# Altium PCB CANwheel.PcbDoc
Units mm, origin at the board's own origin, x right, y up, seen from the top; angles counter-clockwise.
Board outline 89.41 x 48.44 mm, 2 copper layers (Top Layer, Bottom Layer); 59 components, 50 nets, 191 pads, 51 vias.
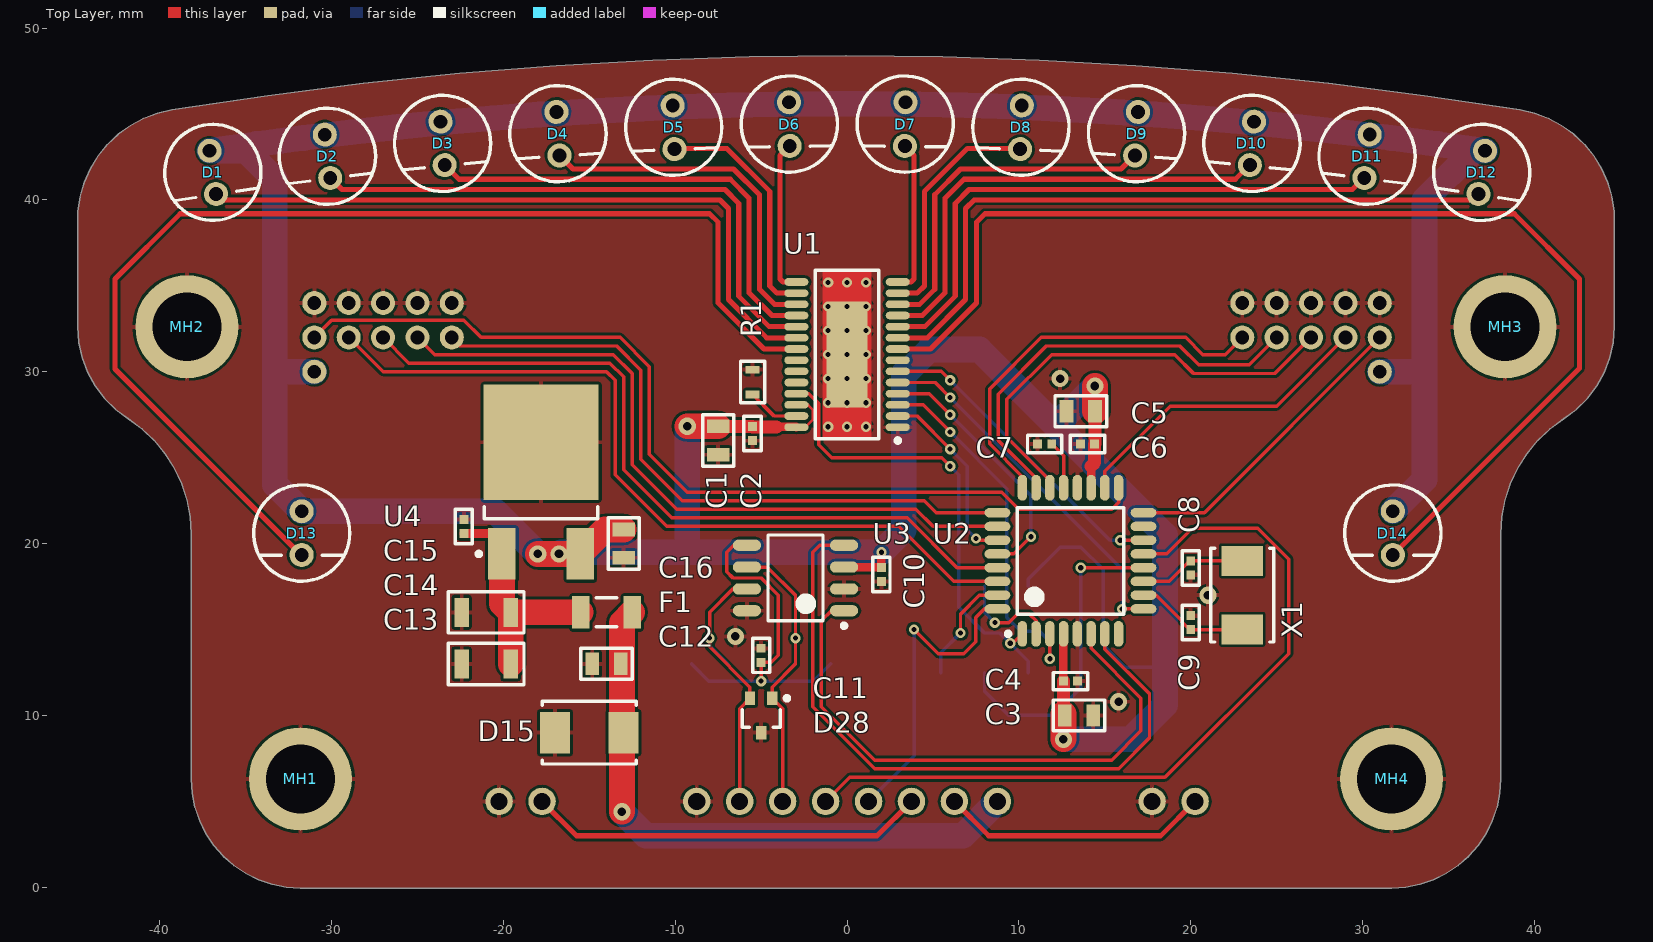
[diagram p0: Top Layer view]
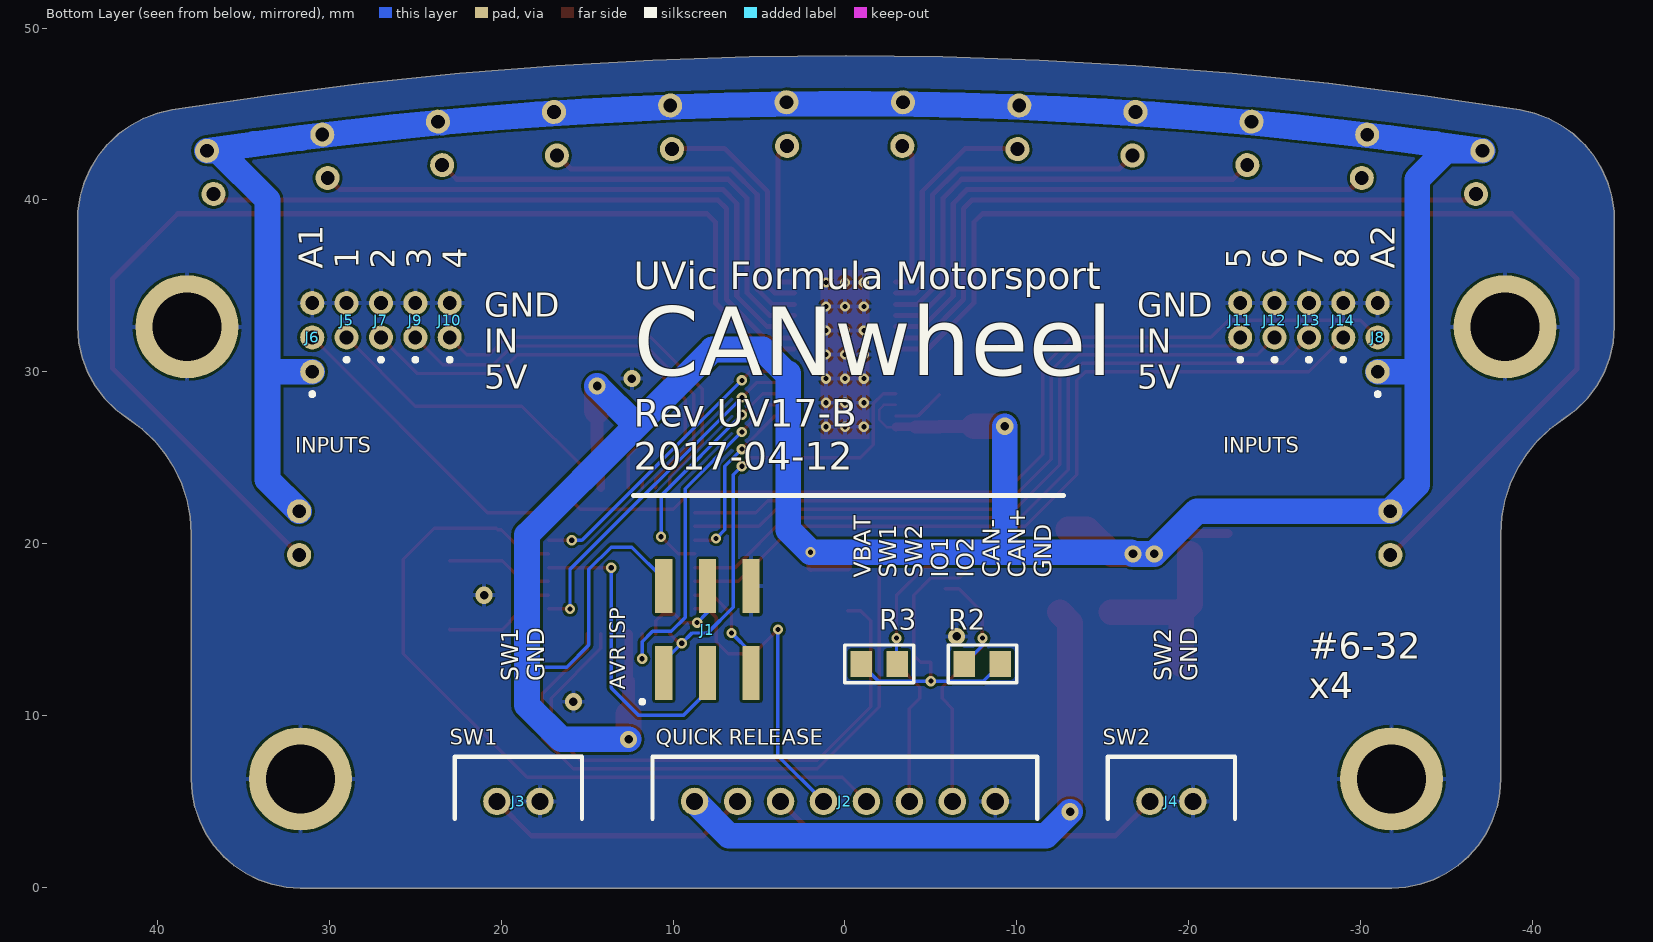
[diagram p1: Bottom Layer view, seen from below]
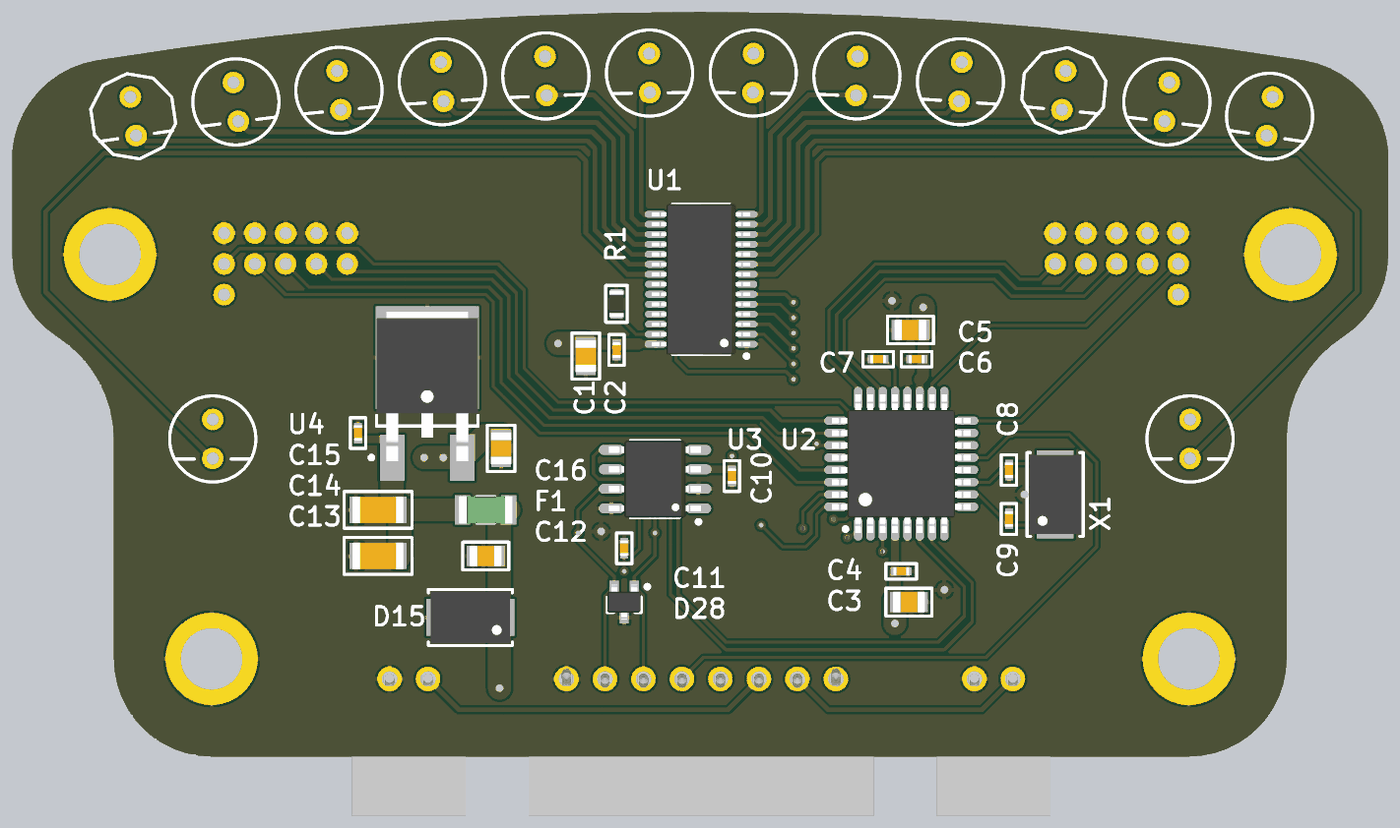
[diagram p2: 3D render of the assembled board from above, using the file's embedded part models]

## Layer stack, top to bottom
Top Solder: solder mask 0.0102, Solder Resist, Dk 3.5
Top Layer: signal copper 0.0356
Dielectric 1: dielectric 0.32, FR-4, Dk 4.8
Bottom Layer: signal copper 0.0356
Bottom Solder: solder mask 0.0102, Solder Resist, Dk 3.5

## Board outline
-38.224,21.56 -38.41,22.537 -38.716,23.483 -39.139,24.384 -39.671,25.224 -40.303,25.992 -41.027,26.674 -41.831,27.26 -42.56,27.802 -43.205,28.444 -43.751,29.17 -44.188,29.967 -44.507,30.819 -44.701,31.707 -44.766,32.614 -44.766,39.325 -44.636,40.183 -44.393,41.017 -44.043,41.811 -43.59,42.551 -43.044,43.226 -42.413,43.822 -41.709,44.329 -40.944,44.739 -40.132,45.044 -39.286,45.239 -33.721,46.074 -28.138,46.782 -22.541,47.361 -16.931,47.811 -11.313,48.133 -5.689,48.325 -0.061,48.389 5.566,48.325 11.19,48.133 16.808,47.811 22.418,47.361 28.016,46.782 33.598,46.074 39.164,45.239 40.009,45.044 40.822,44.739 41.587,44.329 42.291,43.822 42.921,43.226 43.468,42.551 43.92,41.811 44.271,41.017 44.513,40.183 44.643,39.325 44.643,32.614 44.578,31.707 44.384,30.819 44.065,29.967 43.628,29.17 43.082,28.444 42.437,27.802 41.708,27.26 40.904,26.674 40.181,25.992 39.548,25.224 39.016,24.384 38.594,23.483 38.287,22.537 38.101,21.56 38.039,20.568 38.039,6.304 37.984,5.475 37.822,4.66 37.555,3.874 37.188,3.129 36.726,2.438 36.179,1.813 35.554,1.266 34.864,0.804 34.119,0.437 33.332,0.17 32.518,0.008 31.689,-0.046 -31.811,-0.046 -32.64,0.008 -33.455,0.17 -34.241,0.437 -34.986,0.804 -35.677,1.266 -36.301,1.813 -36.849,2.438 -37.311,3.129 -37.678,3.874 -37.945,4.66 -38.107,5.475 -38.161,6.304 -38.161,20.568

## Design rules (kind name [scope] priority, off if disabled: settings)
Clearance [All] p1: gap=0.152 ignorepadtopadclearanceinfootprint=FALSE
HoleSize [All] p1: absolutevalues=TRUE maxlimit=6.3 minlimit=0.025 maxpercent=80.000 minpercent=20.000
MinimumSolderMaskSliver [All] p1: minsoldermaskwidth=0.01
PlaneConnect [All] p1: planeconnectstyle=Relief reliefexpansion=0.508 reliefentries=4 reliefconductorwidth=0.254 reliefairgap=0.2
PolygonConnect [All] p1: connectstyle=Relief reliefconductorwidth=0.254 reliefentries=4 polygonreliefangle="90 Angle" airgapwidth=0.15
RoutingVias [All] p1: holewidth=0.711 width=1.27 viastyle="Through Hole" minholewidth=0.3 minwidth=0.6 maxholewidth=0.711 maxwidth=1.27
SilkToSilkClearance [All] p1: silktosilkclearance=0.15
SilkToSolderMaskClearance [IsPad] p1: minsilkscreentomaskgap=0.1 clearancetoexposedcopper=TRUE
SolderMaskExpansion [All] p1: expansion=0.02
Width [All] p1: maxlimit=2 minlimit=0.152 preferedwidth=0.152 minimp=50.000000 maximp=50.000000 favimp=50.000000
25 further rules are at their usual default settings.

## Classes and differential pairs
net class INPUT: IN_1 IN_2 IN_3 IN_4 IN_5 IN_6 IN_7 IN_8 IN_A_1 IN_A_2
component class Mechanical: MH1 MH2 MH3 MH4
component class LEDs: C1 C2 D1 D2 D3 D4 D5 D6 D7 D8 D9 D10 D11 D12 D13 D14 R1 U1
component class Microcontroller: C3 C4 C5 C6 C7 C8 C9 C10 C11 J1 R2 R3 U2 U3 X1
component class Power: C12 C13 C14 C15 C16 D15 F1 U4
component class Connectors: D28 D? J2 J3 J4 J5 J6 J7 J8 J9 J10 J11 J12 J13 J14 J?

## Components (designator, comment, footprint, x,y, rotation, side; value= is the part's Value field where it differs from the comment)
C1 "CAP 10µF ±10% 6.3V 0805 X7R" CAP-0805-M -7.5,26 r270 top value=10µF
C2 "CAP 0.10µF ±10% 6.3V 0402 X7R" CAP-0402-M -5.5,26.4 r270 top value=0.10µF
C3 "CAP 10µF ±10% 6.3V 0805 X7R" CAP-0805-M 13.5,10 r0 top value=10µF
C4 "CAP 0.10µF ±10% 6.3V 0402 X7R" CAP-0402-M 13,12 r0 top value=0.10µF
C5 "CAP 10µF ±10% 6.3V 0805 X7R" CAP-0805-M 13.6,27.7 r180 top value=10µF
C6 "CAP 0.10µF ±10% 6.3V 0402 X7R" CAP-0402-M 14,25.8 r180 top value=0.10µF
C7 "CAP 0.10µF ±10% 6.3V 0402 X7R" CAP-0402-M 11.5,25.8 r180 top value=0.10µF
C8 "CAP 12pF ±5% 50V 0402 C0G, NP0" CAP-0402-M 20,18.59 r90 top value=12pF
C9 "CAP 12pF ±5% 50V 0402 C0G, NP0" CAP-0402-M 20,15.41 r270 top value=12pF
C10 "CAP 0.10µF ±10% 6.3V 0402 X7R" CAP-0402-M 2,18.2 r270 top value=0.10µF
C11 "CAP 4700pF ±10% 16V 0402 X7R" CAP-0402-M -5,13.5 r270 top value=4.7nF
C12 "CAP 1nF ±10% 250V 0805 X7R" CAP-0805-M -14,13 r180 top value=1nF
C13 "CAP 10µF ±10% 25V 1206 X7R" CAP-1206-M -21,13 r0 top value=10µF
C14 "CAP 10µF ±10% 25V 1206 X7R" CAP-1206-M -21,16 r0 top value=10µF
C15 "CAP 0.10µF ±10% 25V 0402 X7R" CAP-0402-M -22.3,21 r270 top value=0.10µF
C16 "CAP 10µF ±10% 6.3V 0805 X7R" CAP-0805-M -13,20 r270 top value=10µF
D1 "C503B-GCN" LED-5MM-G -36.908,41.603 r278.43 top locked
D2 "C503B-GCN" LED-5MM-G -30.234,42.54 r277.09 top locked
D3 "C503B-GCN" LED-5MM-G -23.537,43.29 r275.53 top locked
D4 "C503B-GCN" LED-5MM-G -16.822,43.853 r273.96 top locked
D5 "C503B-RCN" LED-5MM-R -10.093,44.228 r272.39 top locked
D6 "C503B-RCN" LED-5MM-R -3.357,44.415 r270.83 top locked
D7 "C503B-RCN" LED-5MM-R 3.382,44.415 r269.26 top locked
D8 "C503B-RCN" LED-5MM-R 10.118,44.228 r267.69 top locked
D9 "C503B-BCN" LED-5MM-B 16.846,43.853 r266.13 top locked
D10 "C503B-BCN" LED-5MM-B 23.562,43.29 r264.56 top locked
D11 "C503B-BCN" LED-5MM-B 30.259,42.54 r262.99 top locked
D12 "C503B-BCN" LED-5MM-B 36.932,41.603 r261.43 top locked
D13 "C503B-ACN" LED-5MM-A -31.738,20.612 r270 top locked
D14 "C503B-GCN" LED-5MM-G 31.762,20.612 r270 top locked
D15 "SMAJ30C" SON127P500X135-2N -15,9 r180 top
D28 "PESD1CAN-U" SOT65P210X110-3N -5,10 r270 top
F1 "0ZCJ0035AF2E" 0ZCJ-1206-0.9 -14,16 r180 top value=350mA
J1 "M20-8760342" M20-8760342 8,15 r180 bottom
J2 "53426-0810" 53426-0810 0,5 r180 bottom locked
J3 "53426-0210" 53426-0210 19,5 r180 bottom
J4 "53426-0210" 53426-0210 -19,5 r180 bottom
J5 "Wire-2-0.7mm" WIRE-2-0.7MM 29,33 r90 bottom
J6 "Wire-3-0.7mm" WIRE-3-0.7MM 31,32 r90 bottom
J7 "Wire-2-0.7mm" WIRE-2-0.7MM 27,33 r90 bottom
J8 "Wire-3-0.7mm" WIRE-3-0.7MM -31,32 r90 bottom
J9 "Wire-2-0.7mm" WIRE-2-0.7MM 25,33 r90 bottom
J10 "Wire-2-0.7mm" WIRE-2-0.7MM 23,33 r90 bottom
J11 "Wire-2-0.7mm" WIRE-2-0.7MM -23,33 r90 bottom
J12 "Wire-2-0.7mm" WIRE-2-0.7MM -25,33 r90 bottom
J13 "Wire-2-0.7mm" WIRE-2-0.7MM -27,33 r90 bottom
J14 "Wire-2-0.7mm" WIRE-2-0.7MM -29,33 r90 bottom
MH1 "#6-32" MH-6-32 -31.811,6.304 r0 top locked
MH2 "#6-32" MH-6-32 -38.416,32.614 r0 top locked
MH3 "#6-32" MH-6-32 38.293,32.614 r0 top locked
MH4 "#6-32" MH-6-32 31.689,6.304 r0 top locked
R1 "RES 2K43 1% 1/10 W 0603 ±100ppm/°C" RES-0603-M -5.5,29.4 r270 top value=2K43
R2 "RES 60R4 1% 1/8 W 0805 ±100ppm/°C" RES-0805-M -8,13 r180 bottom value=60R4
R3 "RES 60R4 1% 1/8 W 0805 ±100ppm/°C" RES-0805-M -2,13 r0 bottom value=60R4
U1 "TLC5940PWP" TSOP65P640X120_HS-29N 0,31 r180 top
U2 "ATMEGA16M1-AU" TQFP80P900X900X120-32N 13,19 r90 top
U3 "SN65HVDA1050AQDRQ1" SOIC127P600X175-8M -3,18 r180 top
U4 "LF50ABDT-TRY" DPAK228P972X240-3N -17.8,23.55 r90 top
X1 "7A-16.000MAAE-T" SON127P500X135-2N 23,17 r90 top value=16MHz

## Footprints (in the part's own frame and the unit in brackets; to place one, negate y for a bottom-side part, rotate by r counter-clockwise, add the part's x,y. Pads: shape width x height; smd on the part's side, far side on the other; paste and mask are expansions set on the pad)
0ZCJ-1206-0.9 [mm]
  rect 1x1.9 smd: 1(-1.5,0) 2(1.5,0)
  silkscreen extent -0.6,-0.85 0.6,0.85, body extent -1.75,-0.9 1.75,0.9, height 0.9
53426-0210 [mm]
  round 1.6 hole 1: 1(-1.25,0) 2(1.25,0)
  silkscreen extent -3.7,-1 3.7,2.6, body extent -3.7,-8.9 3.7,2.6, height 6.75
53426-0810 [mm]
  round 1.6 hole 1: 1(-8.75,0) 2(-6.25,0) 3(-3.75,0) 4(-1.25,0) 5(1.25,0) 6(3.75,0) 7(6.25,0) 8(8.75,0)
  silkscreen extent -11.2,-1 11.2,2.6, body extent -11.2,-8.9 11.2,2.6, height 6.75
CAP-0402-M [mm] "Chip Capacitor, 2-Leads, Body 1.00x0.50mm, IPC High Density"
  rect 0.52x0.52 smd: 1(-0.41,0) 2(0.41,0)
  silkscreen extent -1,-0.5 1,0.5, body extent -0.53,-0.28 0.53,0.28, height 0.55
CAP-0805-M [mm] "Chip Capacitor, 2-Leads, Body 2.00x1.25mm, IPC High Density"
  rect 0.8x1.3 smd: 1(-0.825,0) 2(0.825,0)
  silkscreen extent -1.5,-0.9 1.5,0.9, body extent -1.05,-0.67 1.05,0.67, height 1.35
CAP-1206-M [mm] "Chip Capacitor, 2-Leads, Body 3.20x1.60mm, IPC High Density"
  rect 0.85x1.7 smd: 1(-1.425,0) 2(1.425,0)
  silkscreen extent -2.2,-1.2 2.2,1.2, body extent -1.68,-0.87 1.68,0.87, height 1.35
DPAK228P972X240-3N [mm] "D-PAK, 3-Pads, Body 6.20x6.66mm (max), IPC Medium Density"
  rect 3x1.6 smd: 1(-4.15,2.28) 3(-4.15,-2.28)
  rect 6.7x6.7 smd: 4(2.35,0)
  silkscreen extent -4.27,-3.3 -1.4,3.75, body extent -4.4,-3.3 5.33,3.3, height 2.4
LED-5MM-A [mm]
  round 1.4 hole 0.8: 1(-1.27,0) 2(1.27,0)
  silkscreen extent -2.8,-2.8 2.8,2.8, body extent -2.8,-2.8 2.8,2.8, height 8.8
LED-5MM-B [mm]
  round 1.4 hole 0.8: 1(-1.27,0) 2(1.27,0)
  silkscreen extent -2.8,-2.8 2.8,2.8, body extent -2.8,-2.8 2.8,2.8, height 8.8
LED-5MM-G [mm]
  round 1.4 hole 0.8: 1(-1.27,0) 2(1.27,0)
  silkscreen extent -2.8,-2.8 2.8,2.8, body extent -2.8,-2.8 2.8,2.8, height 8.8
LED-5MM-R [mm]
  round 1.4 hole 0.8: 1(-1.27,0) 2(1.27,0)
  silkscreen extent -2.8,-2.8 2.8,2.8, body extent -2.8,-2.8 2.8,2.8, height 8.8
M20-8760342 [mm]
  rect 1x3.15 smd: 1(-2.54,-2.525) 2(-2.54,2.525) 3(0,-2.525) 4(0,2.525) 5(2.54,-2.525) 6(2.54,2.525)
  body extent -3.83,-3.7 3.79,3.5, height 9.93
MH-6-32 [mm]
  round 6 hole 4: 1(0,0)
RES-0603-M [mm] "Chip Resistor, 2-Leads, Body 1.60x0.80mm, IPC High Density"
  rect 0.45x0.8 smd: 1(-0.725,0) 2(0.725,0)
  silkscreen extent -1.2,-0.7 1.2,0.7, body extent -0.85,-0.45 0.85,0.45, height 0.55
RES-0805-M [mm] "Chip Resistor, Body 2.0x1.3mm, IPC Low Density"
  rect 1.25x1.5 smd: 1(-1.05,0) 2(1.05,0)
  silkscreen extent -2,-1.1 2,1.1, body extent -1.1,-0.67 1.1,0.67, height 0.7
SOIC127P600X175-8M [mm] "SOIC, 8-Leads, Body 4.90x3.90mm, Pitch 1.27mm, IPC Low Density"
  oval 1.65x0.65 smd: 1(-2.825,1.905) 2(-2.825,0.635) 3(-2.825,-0.635) 4(-2.825,-1.905) 5(2.825,-1.905) 6(2.825,-0.635) 7(2.825,0.635) 8(2.825,1.905)
  silkscreen extent -2.95,-2.5 1.6,2.9, body extent -3,-2.5 3,2.5, height 1.75
SON127P500X135-2N [mm] "SON, 2-Leads, Body 3.20x5.00mm, Pitch 1.27mm, IPC Medium Density"
  rect 1.75x2.4 smd: 1(-1.995,0) 2(1.995,0)
  silkscreen extent -2.73,-1.83 2.73,1.83, body extent -2.58,-1.68 2.58,1.68, height 1.35
SOT65P210X110-3N [mm] "SOT23, 3-Leads, Body 2.00x2.10mm, Pitch 0.65mm, IPC Medium Density"
  rect 0.8x0.6 smd: 1(-1,0.65) 2(-1,-0.65) 3(1,0)
  silkscreen extent -1.12,-1.1 0.67,1.63, body extent -1.15,-1.1 1.15,1.1, height 1.1
TQFP80P900X900X120-32N [mm] "TQFP, 32-Leads, Body 7.00x7.00mm, Pitch 0.80mm, IPC Medium Density"
  oval 1.5x0.55 smd: 1(-4.25,2.8) 2(-4.25,2) 3(-4.25,1.2) 4(-4.25,0.4) 5(-4.25,-0.4) 6(-4.25,-1.2) 7(-4.25,-2) 8(-4.25,-2.8) 17(4.25,-2.8) 18(4.25,-2) 19(4.25,-1.2) 20(4.25,-0.4) 21(4.25,0.4) 22(4.25,1.2) 23(4.25,2) 24(4.25,2.8)
  oval 0.55x1.5 smd: 9(-2.8,-4.25) 10(-2,-4.25) 11(-1.2,-4.25) 12(-0.4,-4.25) 13(0.4,-4.25) 14(1.2,-4.25) 15(2,-4.25) 16(2.8,-4.25) 25(2.8,4.25) 26(2,4.25) 27(1.2,4.25) 28(0.4,4.25) 29(-0.4,4.25) 30(-1.2,4.25) 31(-2,4.25) 32(-2.8,4.25)
  silkscreen extent -4.37,-3.1 3.1,3.75, body extent -4.5,-4.5 4.5,4.5, height 1.2
TSOP65P640X120_HS-29N [mm] "TSOP, 28-Leads, Body 9.70x4.40mm, Pitch 0.65mm, Thermal Pad 6.17x2.40mm, IPC Medium Density"
  oval 1.4x0.45 smd: 1(-2.95,4.225) 2(-2.95,3.575) 3(-2.95,2.925) 4(-2.95,2.275) 5(-2.95,1.625) 6(-2.95,0.975) 7(-2.95,0.325) 8(-2.95,-0.325) 9(-2.95,-0.975) 10(-2.95,-1.625) 11(-2.95,-2.275) 12(-2.95,-2.925) 13(-2.95,-3.575) 14(-2.95,-4.225) 15(2.95,-4.225) 16(2.95,-3.575) 17(2.95,-2.925) 18(2.95,-2.275) 19(2.95,-1.625) 20(2.95,-0.975) 21(2.95,-0.325) 22(2.95,0.325) 23(2.95,0.975) 24(2.95,1.625) 25(2.95,2.275) 26(2.95,2.925) 27(2.95,3.575) 28(2.95,4.225)
  rect 2.4x6.17 smd mask+0: 29(0,0)
  Top Layer region: -1.4,4.9 -1.4,-4.9 1.4,-4.9 1.4,4.9
  silkscreen extent -3.08,-4.9 1.85,5.12, body extent -3.2,-4.9 3.2,4.9, height 1.2
WIRE-2-0.7MM [mm]
  round 1.4 hole 0.8: 1(-1,0) 2(1,0)
  silkscreen extent -2.4,-0.1 -2.2,0.1
WIRE-3-0.7MM [mm]
  round 1.4 hole 0.8: 1(-2,0) 2(0,0) 3(2,0)
  silkscreen extent -3.4,-0.1 -3.2,0.1

## Part data
C1 C3 C5 C16: library part CC0805KKX7R5BB106, Manufacturer=Yageo, Manufacturer Series=CC, Package=0805, Supplier Part Number 1=311-1877-1-ND, Temperature Coefficient=X7R, Temperature Range="-55°C ~ 125°C", Tolerance=±10%, Voltage=6.3V, Component Type=Standard, Part Number=CC0805KKX7R5BB106, Supplier 1=Digi-Key
C2 C4 C6 C7 C10: library part CC0402KRX7R5BB104, Manufacturer=Yageo, Manufacturer Series=CC, Package=0402, Supplier Part Number 1=311-1701-1-ND, Temperature Coefficient=X7R, Temperature Range="-55°C ~ 125°C", Tolerance=±10%, Voltage=6.3V, Component Type=Standard, Part Number=CC0402KRX7R5BB104, Supplier 1=Digi-Key
C8 C9: library part CC0402JRNPO9BN120, Manufacturer=Yageo, Manufacturer Series=CC, Package=0402, Supplier Part Number 1=311-1016-1-ND, Temperature Coefficient="C0G, NP0", Temperature Range="-55°C ~ 125°C", Tolerance=±5%, Voltage=50V, Component Type=Standard, Part Number=CC0402JRNPO9BN120, Supplier 1=Digi-Key
C11: library part CC0402KRX7R7BB472, Manufacturer=Yageo, Manufacturer Series=CC, Package=0402, Supplier Part Number 1=311-1709-1-ND, Temperature Coefficient=X7R, Temperature Range="-55°C ~ 125°C", Tolerance=±10%, Voltage=16V, Component Type=Standard, Part Number=CC0402KRX7R7BB472, Supplier 1=Digi-Key
C12: library part CC0805KRX7RYBB102, Manufacturer=Yageo, Manufacturer Series=CC, Package=0805, Supplier Part Number 1=311-1470-1-ND, Temperature Coefficient=X7R, Temperature Range="-55°C ~ 125°C", Tolerance=±10%, Voltage=250V, Component Type=Standard, Part Number=CC0805KRX7RYBB102, Supplier 1=Digi-Key
C13 C14: library part CC1206KKX7R8BB106, Manufacturer=Yageo, Manufacturer Series=CC, Package=1206, Supplier Part Number 1=311-1959-1-ND, Temperature Coefficient=X7R, Temperature Range="-55°C ~ 125°C", Tolerance=±10%, Voltage=25V, Component Type=Standard, Part Number=CC1206KKX7R8BB106, Supplier 1=Digi-Key
C15: library part CC0402KRX7R8BB104, Manufacturer=Yageo, Manufacturer Series=CC, Package=0402, Supplier Part Number 1=311-2077-1-ND, Temperature Coefficient=X7R, Temperature Range="-55°C ~ 125°C", Tolerance=±10%, Voltage=25V, Component Type=Standard, Part Number=CC0402KRX7R8BB104, Supplier 1=Digi-Key
J2 J3 J4: "Molex Mini-Lock™ 53426"
MH1 MH2 MH3 MH4: library part "#6-32 Mounting Hole", "#6-32 Mounting hole"
R1: library part RC0603FR-072K43L, Manufacturer=Yageo, Manufacturer Series=RC, Package=0603, Power="1/10 W", Supplier Part Number 1=311-2.43KHRCT-ND, Temperature Coefficient=±100ppm/°C, Temperature Range="-55°C ~ 155°C", Tolerance=1%, Component Type=Standard, Part Number=RC0603FR-072K43L, Supplier 1=Digi-Key
R2 R3: library part RC0805FR-0760R4L, Manufacturer=Yageo, Manufacturer Series=RC, Package=0805, Power="1/8 W", Supplier Part Number 1=311-60.4CRCT-ND, Temperature Coefficient=±100ppm/°C, Temperature Range="-55°C ~ 155°C", Tolerance=1%, Component Type=Standard, Part Number=RC0805FR-0760R4L, Supplier 1=Digi-Key
U2: "ATmega16M1 32-QFP 7x7 mm"
U3: "CAN transceiver", Supplier Part Number 1=296-25836-1-ND, Supplier 1=Digi-Key
U4: Supplier Part Number 1=497-10199-1-ND, Supplier 1=Digi-Key
X1: "SMD Crystal Oscillator 12 pF", Load Capacitance=12pF, Supplier Part Number 1=887-1747-1-ND, Supplier 1=Digi-Key

## Via types
v1: diameter 0.6, hole 0.3, Top Layer to Bottom Layer, tented both sides, 41 vias
v2: diameter 1, hole 0.5, Top Layer to Bottom Layer, tented both sides, 10 vias

## Nets (pads, with @x,y where several pads share a name; then routed paths per layer and width w, separated by ;. In a path a pad name is that pad's centre, name@x,y a point inside that pad or via, vN(x,y) a via of type N, cw(c..) or ccw(c..) an arc to the next point about the centre after c; other vN are vias at no path point)
+5V: C1.1 C2.1 C3.1 C4.1 C5.1 C6.1 C10.1 C16.1 D1.1 D2.1 D3.1 D4.1 D5.1 D6.1 D7.1 D8.1 D9.1 D10.1 D11.1 D12.1 D13.1 D14.1 J1.2 J6.1 J8.1 U1.26 U1.28 U2.4 U2.19 U3.3 U4.3 | length 265.2
  Top Layer w0.154: U1.28 -2.425,26.775 -2,27.2 -2,27.8 -2.275,28.075 U1.26
  Top Layer w0.5: C1.1 C1.1@-7.485,26.81 ; -5.965,26.775 -5.465,26.775 C2.1@-5.488,26.798 ; -4.1,26.798 -2.973,26.798 U1.28 ; U3.3 1.975,18.635 C10.1 v1(2,19.5) ; C4.1 12.59,14.74 U2.4 ; U2.19 14.2,24.5
  Top Layer w0.75: C1.1@-7.485,26.81 C2.1 -5.488,26.798 -4.1,26.798 ; C4.1 12.59,10.085 C3.1 ; 14.2,24.5 14.41,24.71 C6.1 14.425,25.815 C5.1
  Top Layer w1.5: v2(-18,19.4) U4.3 -14.095,20.825 C16.1 ; v2(-9.3,26.825) C1.1 ; v2(12.59,8.61) C3.1@12.59,10.085 ; C5.1 v2(14.425,29.175)
  Bottom Layer w0.2: J1.2 10.54,17.94 12.4,19.8 13.6,19.8 14.9,18.5 14.9,14.1 16.2,12.8 17.7,12.8
  Bottom Layer w1.5: J8.1 -33.3,30 ; v2(-9.3,26.825) -9.3,19.6 -9.2,19.5 ; v2(12.59,8.61) 16.51,8.61 18.5,10.6 18.5,20.5 12.2,26.8 ; v2(14.425,29.175) 12.2,26.95 12.2,26.8 ; J6.1 33.5,30 33.6,29.9 ; D14.1 33.6,23.719 33.6,29.9 ; -33.3,30 -33.3,41.2 -34.96,42.86 D1.1 cw(c0.012,-206.731) D12.1 36.459,42.859 33.6,40 33.6,29.9 ; -33.3,30 -33.3,23.444 D13.1 -20.482,21.882 v2(-18,19.4) v2(-16.76,19.4) -16.66,19.5 -9.2,19.5 ; -9.2,19.5 v1(2,19.5) 3.3,20.8 3.3,29.9 3.4,29.9 4.8,31.3 7.7,31.3 12.2,26.8
+12V: C13.2 C14.2 C15.2 F1.2 U4.1 | length 12.9
  Top Layer w0.5: C15.2 -20.19,20.59 U4.1@-20.1,20.5
  Top Layer w1.5: U4.1 -20.08,16.505 C14.2 ; C13.2 C14.2 ; F1.2 C14.2
+VBAT: C12.1 D15.1 F1.1 J2.1 | length 35.1
  Top Layer w1.5: v2(-13.1,4.4) -13.1,15.4 F1.1
  Bottom Layer w1.5: v2(-13.1,4.4) -11.7,3 6.75,3 J2.1
CAN_H: D28.2 J2.7 R2.1 U3.7 | length 16.9
  Top Layer w0.2: J2.7 -6.25,10.4 D28.2 -5.65,11.65 -8,14 v1(-8,14.5) -8,16 -6.635,17.365 U3.7
  Bottom Layer w0.2: v1(-8,14.5) -8,14.05 R2.1
CAN_L: D28.1 J2.6 R3.1 U3.6 | length 17.8
  Top Layer w0.2: U3.6 -4.635,18.635 -3,17 v1(-3,14.5) -3,13 -4.35,11.65 D28.1 -3.75,10.4 J2.6
  Bottom Layer w0.2: R3.1 -3,13.05 v1(-3,14.5)
CAN_RX: U2.7 U3.4 | length 40
  Top Layer w0.2: U3.4 -1.595,19.905 -2,19.5 -2,10.5 1.6,6.9 15.8,6.9 17.6,8.7 17.6,11.264 15,13.864 U2.7
CAN_TX: U2.6 U3.1 | length 34
  Top Layer w0.2: U3.1 -0.905,16.095 -1.5,15.5 -1.5,10.5 1.6,7.4 15.4,7.4 17.1,9.1 17.1,11 14.2,13.9 U2.6
GND: C1.2 C2.2 C3.2 C4.2 C5.2 C6.2 C7.2 C8.1 C9.1 C10.2 C11.1 C12.2 C13.1 C14.1 C15.1 C16.2 D15.2 D28.3 J1.6 J2.8 J3.2 J4.2 J5.2 J6.3 J7.2 J8.3 J9.2 J10.2 J11.2 J12.2 J13.2 J14.2 MH1.1 MH2.1 MH3.1 MH4.1 R1.1 U1.1 U1.29 U2.5 U2.20 U3.2 U3.8 U4.4
  other v1: -1.1,26.8 0,26.8 1.1,26.8 -1.1,28.2 0,28.2 1.1,28.2 -1.1,29.6 0,29.6 1.1,29.6 -1.1,31 0,31 1.1,31 -1.1,32.4 0,32.4 1.1,32.4 -1.1,33.8 0,33.8 1.1,33.8 -1.1,35.2 0,35.2 1.1,35.2
  other v2: 15.8,10.8 -6.5,14.6 21,17 12.4,29.6
IN_1: J5.1 U2.18 | length 18.2
  Top Layer w0.2: U2.18 15,24.2 18.8,28 25,28 J5.1
IN_2: J7.1 U2.22 | length 26.3
  Top Layer w0.2: U2.22 11.8,23.7 9.3,26.2 9.3,28.4 11.9,31 19.062,31 20.162,29.9 24.9,29.9 J7.1
IN_3: J9.1 U2.23 | length 24.8
  Top Layer w0.2: U2.23 11,23.8 8.8,26 8.8,28.7 11.6,31.5 19.355,31.5 20.455,30.4 23.4,30.4 J9.1
IN_4: J10.1 U2.24 | length 23.3
  Top Layer w0.2: U2.24 10.2,23.9 8.3,25.8 8.3,29 11.3,32 19.7,32 20.7,31 22,31 J10.1
IN_5: J11.1 U2.25 | length 39
  Top Layer w0.2: J11.1 -22.5,31.5 -13.4,31.5 -12,30.1 -12,24.9 -9.6,22.5 4.5,22.5 5.2,21.8 U2.25
IN_6: J12.1 U2.26 | length 41.4
  Top Layer w0.2: J12.1 -24,31 -13.6,31 -12.5,29.9 -12.5,24.6 -9.9,22 4,22 5,21 U2.26
IN_7: J13.1 U2.29 | length 44.5
  Top Layer w0.2: J13.1 -25.5,30.5 -13.798,30.5 -13,29.702 -13,24.3 -10.2,21.5 3.5,21.5 6.4,18.6 U2.29
IN_8: J14.1 U2.30 | length 46.9
  Top Layer w0.2: J14.1 -27,30 -14,30 -13.5,29.5 -13.5,24 -10.5,21 3,21 6.2,17.8 U2.30
IN_A_1: J6.2 U2.16 | length 18
  Top Layer w0.2: U2.16 20.8,21.8 J6.2
IN_A_2: J8.2 U2.17 | length 55.8
  Top Layer w0.2: J8.2 -30,33 -22.3,33 -21.3,32 -13.2,32 -11.5,30.3 -11.5,25.2 -9.3,23 9,23 10,22 15.4,22 15.8,22.4 U2.17
IO_1: J2.4 U2.32 | length 18.4
  Top Layer w0.2: v1(3.9,15) 5.3,13.6 6.8,13.6 7.5,14.3 7.5,15.7 8,16.2 U2.32
  Bottom Layer w0.2: J2.4 3.9,7.65 v1(3.9,15)
IO_2: J2.5 U2.13 | length 45.8
  Top Layer w0.2: J2.5 0.15,6.4 18.5,6.4 25.7,13.6 25.7,19.1 23.9,20.9 20.3,20.9 20.2,20.8 20,20.8 18.6,19.4 U2.13
ISP_MISO_LED_GSCLK: J1.1 U1.25 U2.1 | length 27.5
  Top Layer w0.2: U1.25 -2.225,28.725 -1.652,28.152 -1.652,25.752 -0.9,25 5.5,25 v1(6,24.5) ; v1(9.5,14.2) 9.65,14.2 U2.1
  Bottom Layer w0.2: v1(6,24.5) 6.5,24 6.5,16.3 8,14.8 8.9,14.8 v1(9.5,14.2) 10.54,13.16 J1.1
ISP_MOSI_TXD: J1.4 U2.2 | length 5.9
  Top Layer w0.2: v1(8.6,15.4) 9.4,15.4 9.9,15.9 10.6,15.9 11,15.5 U2.2
  Bottom Layer w0.2: J1.4 8,16 v1(8.6,15.4)
ISP_RESETn: J1.5 U2.31 | length 6.5
  Top Layer w0.2: v1(6.6,14.8) 6.6,15.9 7.7,17 U2.31
  Bottom Layer w0.2: J1.5 5.46,13.66 v1(6.6,14.8)
ISP_SCK_RXD: J1.3 U2.12 | length 18.6
  Top Layer w0.2: v1(13.6,18.6) U2.12
  Bottom Layer w0.2: J1.3 8,11.4 9.4,10 12,10 13.6,11.6 v1(13.6,18.6)
LED_1: D13.2 U1.21 | length 67.8
  Top Layer w0.3: D13.2@-31.774,19.342 -42.6,30.168 -42.6,35.4 -38.8,39.2 -8,39.2 -7.5,38.7 -7.5,34 -4.825,31.325 U1.21
LED_2: D1.2 U1.20 | length 40.3
  Top Layer w0.3: D1.2 -36.374,40 -7.4,40 -6.9,39.5 -6.9,34.2 -4.675,31.975 U1.20
LED_3: D2.2 U1.19 | length 33.9
  Top Layer w0.3: D2.2 -29.397,40.6 -7.1,40.6 -6.3,39.8 -6.3,34.4 -4.525,32.625 U1.19
LED_4: D3.2 U1.18 | length 27.3
  Top Layer w0.3: D3.2 -22.589,41.2 -6.8,41.2 -5.7,40.1 -5.7,34.6 -4.375,33.275 U1.18
LED_5: D4.2 U1.17 | length 20.6
  Top Layer w0.3: D4.2 -15.948,41.8 -6.6,41.8 -5.1,40.3 -5.1,34.8 -4.225,33.925 U1.17
LED_6: D5.2 U1.16 | length 13.8
  Top Layer w0.3: D5.2 -9.999,43 -7,43 -4.5,40.5 -4.5,35 -4.075,34.575 U1.16
LED_7: D6.2 U1.15 | length 9
  Top Layer w0.3: D6.2 -3.9,42.583 -3.9,35.4 -3.725,35.225 U1.15
LED_8: D7.2 U1.14 | length 9
  Top Layer w0.3: U1.14 3.725,35.225 3.9,35.4 3.9,42.583 D7.2@3.339,43.145
LED_9: D8.2 U1.13 | length 13.8
  Top Layer w0.3: U1.13 4.075,34.575 4.5,35 4.5,40.5 7,43 9.999,43 D8.2@10.04,42.959
LED_10: D9.2 U1.12 | length 20.6
  Top Layer w0.3: U1.12 4.225,33.925 5.1,34.8 5.1,40.3 6.6,41.8 15.948,41.8 D9.2@16.734,42.586
LED_11: D10.2 U1.11 | length 27.3
  Top Layer w0.3: U1.11 4.375,33.275 5.7,34.6 5.7,40.1 6.8,41.2 22.589,41.2 D10.2@23.415,42.026
LED_12: D11.2 U1.10 | length 33.9
  Top Layer w0.3: U1.10 4.525,32.625 6.3,34.4 6.3,39.8 7.1,40.6 29.397,40.6 D11.2@30.077,41.28
LED_13: D12.2 U1.9 | length 40.3
  Top Layer w0.3: U1.9 4.675,31.975 6.9,34.2 6.9,39.5 7.4,40 36.374,40 D12.2@36.721,40.347
LED_14: D14.2 U1.8 | length 67.6
  Top Layer w0.3: U1.8@2.977,31.325 4.852,31.325 7.527,34 7.527,38.7 8.027,39.2 38.827,39.2 42.627,35.4 42.627,30.206 32.195,19.774 D14.2@31.801,19.774
LED_BLANK: U1.2 U2.27 | length 11
  Top Layer w0.2: U1.2 4.075,27.425 v1(6,25.5) ; v1(7.5,20.3) 7.6,20.2 U2.27
  Bottom Layer w0.2: v1(6,25.5) 7,24.5 7,20.8 v1(7.5,20.3)
LED_DCSEL: U1.6 U2.14 | length 18.4
  Top Layer w0.2: U1.6 5.475,30.025 v1(6,29.5) ; v1(15.9,20.2) U2.14
  Bottom Layer w0.2: v1(6,29.5) 15.3,20.2 v1(15.9,20.2)
LED_SCLK: U1.4 U2.28 | length 15.1
  Top Layer w0.2: U1.4 4.775,28.725 v1(6,27.5) ; U2.28 9.7,19.4 v1(10.7,20.4)
  Bottom Layer w0.2: v1(6,27.5) 10.7,22.8 v1(10.7,20.4) v1@10.7,20.3
LED_SIN: U1.5 U2.9 | length 21.1
  Top Layer w0.2: U1.5 5.125,29.375 v1(6,28.5) ; v1(16,16.2) U2.9
  Bottom Layer w0.2: v1(6,28.5) 16,18.5 v1(16,16.2)
LED_XLAT: U1.3 U2.3 | length 21.4
  Top Layer w0.2: U1.3 4.425,28.075 v1(6,26.5) ; v1(11.8,13.3) U2.3
  Bottom Layer w0.2: v1(6,26.5) 9.3,23.2 9.3,15.7 10.1,14.9 11.2,14.9 11.8,14.3 v1(11.8,13.3)
NetC7_1: C7.1 U2.21 | length 2.8
  Top Layer w0.2: C7.1 12.6,25.11 U2.21
NetC8_2: C8.2 U2.11 X1.2 | length 6.2
  Top Layer w0.2: U2.11 18.743,17.8 19.943,19 C8.2 22.995,19 X1.2
NetC9_2: C9.2 U2.10 X1.1 | length 6.6
  Top Layer w0.2: U2.10 18,17 19.488,15.512 19.488,15.455 19.943,15 C9.2 22.995,15 X1.1
NetC11_2: C11.2 R2.2 R3.2 U3.5 | length 20.7
  Top Layer w0.2: U3.5 -6.595,19.905 -7,19.5 -7,18.365 -6.635,18 -5,18 -4,17 -4,13.5 -4.41,13.09 C11.2 v1(-5,12)
  Bottom Layer w0.2: R2.2 -8.048,11.998 -6.22,11.998 -6.218,12 v1(-5,12) -3.782,12 -3.78,11.998 -1.952,11.998 R3.2
NetR1_2: R1.2 U1.27 | length 3.1
  Top Layer w0.2: R1.2 -4.25,27.425 U1.27
SW_1: J2.2 J3.1 | length 15.7
  Top Layer w0.3: J2.2 8.25,3 18.25,3 J3.1
SW_2: J2.3 J4.1 | length 23.2
  Top Layer w0.3: J4.1 -15.75,3 1.75,3 J2.3
pads on no net: U1.7 U1.22 U1.23 U1.24 U2.8 U2.15

## Polygon pours and split planes (outlines as drawn)
GND on Bottom Layer "GND_L02_P000" (solid, pour order 0): -38.224,21.56 -38.41,22.537 -38.716,23.483 -39.139,24.384 -39.671,25.224 -40.303,25.992 -41.027,26.674 -41.831,27.26 -42.56,27.802 -43.205,28.444 -43.751,29.17 -44.188,29.967 -44.507,30.819 -44.701,31.707 -44.766,32.614 -44.766,39.325 -44.636,40.183 -44.393,41.017 -44.043,41.811 -43.59,42.551 -43.044,43.226 -42.413,43.822 -41.709,44.329 -40.944,44.739 -40.132,45.044 -39.286,45.239 -33.721,46.074 -28.138,46.782 -22.541,47.361 -16.931,47.811 -11.313,48.133 -5.689,48.325 -0.061,48.389 5.566,48.325 11.19,48.133 16.808,47.811 22.418,47.361 28.016,46.782 33.598,46.074 39.164,45.239 40.009,45.044 40.822,44.739 41.587,44.329 42.291,43.822 42.921,43.226 43.468,42.551 43.92,41.811 44.271,41.017 44.513,40.183 44.643,39.325 44.643,32.614 44.578,31.707 44.384,30.819 44.065,29.967 43.628,29.17 43.082,28.444 42.437,27.802 41.708,27.26 40.904,26.674 40.181,25.992 39.548,25.224 39.016,24.384 38.594,23.483 38.287,22.537 38.101,21.56 38.039,20.568 38.039,6.304 37.984,5.475 37.822,4.66 37.555,3.874 37.188,3.129 36.726,2.438 36.179,1.813 35.554,1.266 34.864,0.804 34.119,0.437 33.332,0.17 32.518,0.008 31.689,-0.046 -31.811,-0.046 -32.64,0.008 -33.455,0.17 -34.241,0.437 -34.986,0.804 -35.677,1.266 -36.301,1.813 -36.849,2.438 -37.311,3.129 -37.678,3.874 -37.945,4.66 -38.107,5.475 -38.161,6.304 -38.161,20.568
GND on Top Layer "GND_L01_P002" (solid, pour order 2): -38.224,21.56 -38.41,22.537 -38.716,23.483 -39.139,24.384 -39.671,25.224 -40.303,25.992 -41.027,26.674 -41.831,27.26 -42.56,27.802 -43.205,28.444 -43.751,29.17 -44.188,29.967 -44.507,30.819 -44.701,31.707 -44.766,32.614 -44.766,39.325 -44.636,40.183 -44.393,41.017 -44.043,41.811 -43.59,42.551 -43.044,43.226 -42.413,43.822 -41.709,44.329 -40.944,44.739 -40.132,45.044 -39.286,45.239 -33.721,46.074 -28.138,46.782 -22.541,47.361 -16.931,47.811 -11.313,48.133 -5.689,48.325 -0.061,48.389 5.566,48.325 11.19,48.133 16.808,47.811 22.418,47.361 28.016,46.782 33.598,46.074 39.164,45.239 40.009,45.044 40.822,44.739 41.587,44.329 42.291,43.822 42.921,43.226 43.468,42.551 43.92,41.811 44.271,41.017 44.513,40.183 44.643,39.325 44.643,32.614 44.578,31.707 44.384,30.819 44.065,29.967 43.628,29.17 43.082,28.444 42.437,27.802 41.708,27.26 40.904,26.674 40.181,25.992 39.548,25.224 39.016,24.384 38.594,23.483 38.287,22.537 38.101,21.56 38.039,20.568 38.039,6.304 37.984,5.475 37.822,4.66 37.555,3.874 37.188,3.129 36.726,2.438 36.179,1.813 35.554,1.266 34.864,0.804 34.119,0.437 33.332,0.17 32.518,0.008 31.689,-0.046 -31.811,-0.046 -32.64,0.008 -33.455,0.17 -34.241,0.437 -34.986,0.804 -35.677,1.266 -36.301,1.813 -36.849,2.438 -37.311,3.129 -37.678,3.874 -37.945,4.66 -38.107,5.475 -38.161,6.304 -38.161,20.568

## Silkscreen, mask and mechanical layers (free items; w line width, h text height)
Bottom Overlay:
  circle w0.254: c11.8,10.8 r0.1
  lines w0.3: -12.7,22.8 12.3,22.8
  text "5 / 6 / 7 / 8 / A2" at -32,36 h1.4 r270
  text "A1 / 1 / 2 / 3 / 4" at 22,36 h1.4 r270
  text "UVic Formula Motorsport" at 12.3,34.8 h1.6
  text "CANwheel" at 12.3,29.8 h4
  text "GND / IN / 5V" at -17,29 h1.4
  text "GND / IN / 5V" at 21,29 h1.4
  text "Rev UV17-B" at 12.3,26.8 h1.6
  text "INPUTS" at -22,25 h1.52
  text "INPUTS" at 32,25 h1.52
  text "2017-04-12" at 12.3,24.3 h1.6
  text "VBAT / SW1 / SW2 / IO1 / IO2 / CAN- / CAN+ / GND" at -12,18 h1 r270
  text "SW2 / GND" at -20.5,12 h1 r270
  text "SW1 / GND" at 17.5,12 h1 r270
  text "AVR ISP" at 12.5,11.5 h1.52 r270
  text "#6-32 / x4" at -27,11 h1.52
  text "SW2" at -15,8 h1.52
  text "QUICK RELEASE" at 11,8 h1.52
  text "SW1" at 23,8 h1.52
Mechanical 1:
  the board outline again, w0.2